# Altium PCB Twintig-IMUs.PcbDoc
Units mm, origin at the board's own origin, x right, y up, seen from the top; angles counter-clockwise.
Board outline 300 x 10 mm, 2 copper layers (Top Copper, Bottom Copper), stack 0.32 mm thick; 25 components, 23 nets, 138 pads, 42 vias.
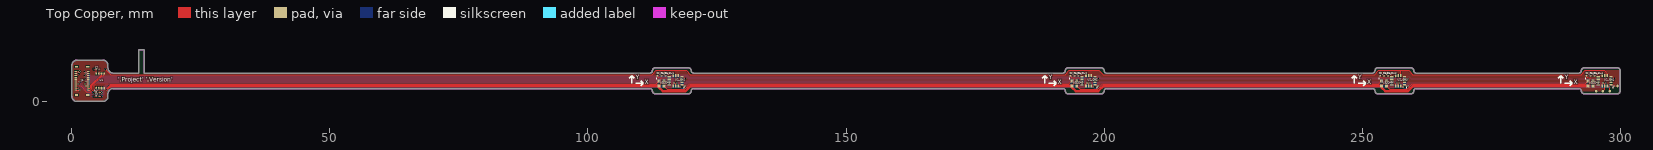
[diagram p0: Top Copper view]
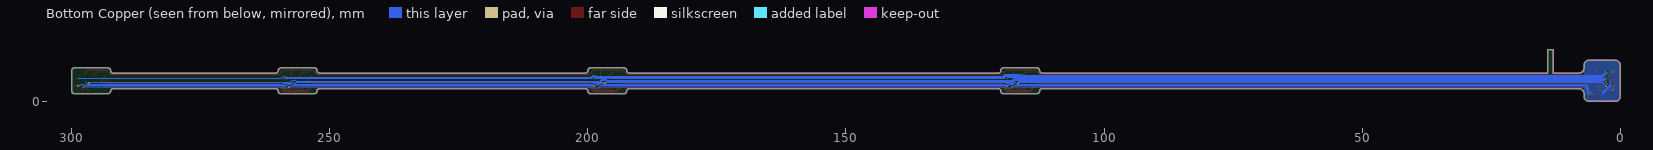
[diagram p1: Bottom Copper view, seen from below]
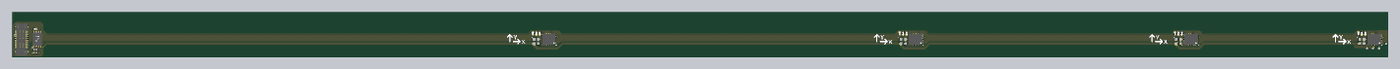
[diagram p2: 3D render of the assembled board from above, using the file's embedded part models]

## Layer stack, top to bottom
Top Coverlay: solder mask 0.0125, FC-001, Dk 4
Top Adhesive: prepreg 0.015, PP-006, Dk 4.1
Top Copper: signal copper 0.035
Polyimide: core 0.025, Core-009, Dk 4.5
Bottom Copper: signal copper 0.035
Bottom Adhesive: prepreg 0.015, PP-006, Dk 4.1
Bottom Coverlay: solder mask 0.0125, FC-001, Dk 4
Stiffener: core 0.195, Core-009, Dk 4.5

## Board outline
292,2.5 cw(c292,2) 292.5,2 ccw(c293,2) 293,1.5 299.5,1.5 ccw(c299.5,2) 300,2 300,6 ccw(c299.5,6) 299.5,6.5 293,6.5 ccw(c293,6) 292.5,6.002 292.5,6 cw(c292,6) 292,5.5 260.5,5.5 cw(c260.5,6) 260,6 ccw(c259.5,6) 259.5,6.5 253,6.5 ccw(c253,6) 252.5,6.002 252.5,6 cw(c252,6) 252,5.5 200.5,5.5 cw(c200.5,6) 200,6 200,6.002 ccw(c199.5,6) 199.5,6.5 193,6.5 ccw(c193,6) 192.5,6.002 192.5,6 cw(c192,6) 192,5.5 120.5,5.5 cw(c120.5,6) 120,6 120,6.002 ccw(c119.5,6) 119.5,6.5 113,6.5 ccw(c113,6) 112.5,6.002 112.5,6 cw(c112,6) 112,5.5 14,5.5 14,10 13,10 13,5.5 8,5.5 cw(c8,6.5) 7,6.497 7,6.5 7,7 ccw(c6,7) 6,8 1.002,8 ccw(c1.002,6.998) 0,6.998 0,1.002 ccw(c1.002,1.002) 1.002,0 6,0 ccw(c6,1) 7,1 7,1.5 cw(c8,1.5) 8,2.5 112,2.5 cw(c112,2) 112.5,2 ccw(c113,2) 113,1.5 119.5,1.5 ccw(c119.5,2) 120,1.998 120,2 cw(c120.5,2) 120.5,2.5 192,2.5 cw(c192,2) 192.5,2 ccw(c193,2) 193,1.5 199.5,1.5 ccw(c199.5,2) 200,1.998 200,2 cw(c200.5,2) 200.5,2.5 252,2.5 cw(c252,2) 252.5,2 ccw(c253,2) 253,1.5 259.5,1.5 ccw(c259.5,2) 260,1.998 260,2 cw(c260.5,2) 260.5,2.5
board region "Layer Stack Region 1": 7,1.5 7,6.497 7,6.5 7,7 7,7.098 6.962,7.292 6.886,7.474 6.777,7.637 6.637,7.777 6.474,7.886 6.292,7.962 6.098,8 6,8 1.002,8 0.904,8 0.71,7.961 0.528,7.886 0.363,7.776 0.224,7.637 0.114,7.472 0.039,7.29 0,7.096 0,6.998 0,1.002 0,0.904 0.039,0.71 0.114,0.528 0.224,0.363 0.363,0.224 0.528,0.114 0.71,0.039 0.904,0 1.002,0 6,0 6.098,0 6.292,0.038 6.474,0.114 6.637,0.223 6.777,0.363 6.886,0.526 6.962,0.708 7,0.902 7,1
board region "Layer Stack Region 6": 299.5,1.5 299.599,1.5 299.783,1.576 299.924,1.717 300,1.901 300,2 300,6 300,6.099 299.924,6.283 299.783,6.424 299.599,6.5 299.5,6.5 293,6.5 292.901,6.5 292.717,6.424 292.577,6.284 292.5,6.101 292.5,6.002 292.5,2 292.5,1.901 292.576,1.717 292.717,1.576 292.901,1.5 293,1.5
board region "Layer Stack Region 8": 259.5,1.5 259.599,1.5 259.783,1.576 259.923,1.716 260,1.899 260,1.998 260,6 260,6.099 259.924,6.283 259.783,6.424 259.599,6.5 259.5,6.5 253,6.5 252.901,6.5 252.717,6.424 252.577,6.284 252.5,6.101 252.5,6.002 252.5,2 252.5,1.901 252.576,1.717 252.717,1.576 252.901,1.5 253,1.5
board region "Layer Stack Region 5": 193,1.5 199.5,1.5 199.599,1.5 199.782,1.576 199.923,1.716 200,1.899 200,1.998 200,6.002 200,6.101 199.923,6.284 199.783,6.424 199.599,6.5 199.5,6.5 193,6.5 192.901,6.5 192.717,6.424 192.577,6.284 192.5,6.101 192.5,6.002 192.5,2 192.5,1.901 192.576,1.717 192.717,1.576 192.901,1.5
board region "Layer Stack Region 3": 113,1.5 119.5,1.5 119.599,1.5 119.782,1.576 119.923,1.716 120,1.899 120,1.998 120,6.002 120,6.101 119.923,6.284 119.783,6.424 119.599,6.5 119.5,6.5 113,6.5 112.901,6.5 112.717,6.424 112.577,6.284 112.5,6.101 112.5,6.002 112.5,2 112.5,1.901 112.576,1.717 112.717,1.576 112.901,1.5
board region "Layer Stack Region 2": 8,2.5 112,2.5 112.098,2.49 112.278,2.416 112.416,2.278 112.49,2.098 112.5,2 112.5,6.002 112.5,6 112.49,5.902 112.416,5.722 112.278,5.584 112.098,5.51 112,5.5 14,5.5 14,10 13,10 13,5.5 8,5.5 7.902,5.505 7.71,5.543 7.529,5.618 7.367,5.726 7.228,5.864 7.119,6.027 7.044,6.207 7.005,6.399 7,6.497 7,1.5 7.005,1.598 7.043,1.79 7.118,1.971 7.227,2.134 7.366,2.273 7.529,2.382 7.71,2.457 7.902,2.495
board region "Layer Stack Region 4": 120.5,2.5 192,2.5 192.098,2.49 192.278,2.416 192.416,2.278 192.49,2.098 192.5,2 192.5,6.002 192.5,6 192.49,5.902 192.416,5.722 192.278,5.584 192.098,5.51 192,5.5 120.5,5.5 120.402,5.51 120.222,5.584 120.084,5.722 120.01,5.902 120,6 120,6.002 120,1.998 120,2 120.01,2.098 120.084,2.278 120.222,2.416 120.402,2.49
board region "Default Layer Stack Region": 200.5,2.5 252,2.5 252.098,2.49 252.278,2.416 252.416,2.278 252.49,2.098 252.5,2 252.5,6.002 252.5,6 252.49,5.902 252.416,5.722 252.278,5.584 252.098,5.51 252,5.5 200.5,5.5 200.402,5.51 200.222,5.584 200.084,5.722 200.01,5.902 200,6 200,6.002 200,1.998 200,2 200.01,2.098 200.084,2.278 200.222,2.416 200.402,2.49
board region "Layer Stack Region 7": 292,2.5 292.098,2.49 292.278,2.416 292.416,2.278 292.49,2.098 292.5,2 292.5,6.002 292.5,6 292.49,5.902 292.416,5.722 292.278,5.584 292.098,5.51 292,5.5 260.5,5.5 260.402,5.51 260.222,5.584 260.084,5.722 260.01,5.902 260,6 260,1.998 260,2 260.01,2.098 260.084,2.278 260.222,2.416 260.402,2.49 260.5,2.5

## Design rules (kind name [scope] priority, off if disabled: settings)
Clearance [All] p1: gap=0.1 ignorepadtopadclearanceinfootprint=FALSE except(0: Arc-Hole Track-Hole SMDPad-Hole THPad-Hole Via-Hole Fill-Hole Poly-Hole Region-Hole Text-Hole)
DiffPairsRouting [All] p1: maxlimit=0.254 minlimit=0.1 mostfreqgap=0.1 toplayer_minwidth=0.1 toplayer_maxwidth=0.381 toplayer_prefwidth=0.1 bottomlayer_minwidth=0.1 bottomlayer_maxwidth=0.381 bottomlayer_prefwidth=0.1 substack1={55FC9977-D693-41D2-B5DD-361256E4C1CE} toplayer_{55fc9977-d693-41d2-b5dd-361256e4c1ce}_minwidth=0.381 toplayer_{55fc9977-d693-41d2-b5dd-361256e4c1ce}_maxwidth=0.381 toplayer_{55fc9977-d693-41d2-b5dd-361256e4c1ce}_prefwidth=0.381 bottomlayer_{55fc9977-d693-41d2-b5dd-361256e4c1ce}_minwidth=0.381 bottomlayer_{55fc9977-d693-41d2-b5dd-361256e4c1ce}_maxwidth=0.381 bottomlayer_{55fc9977-d693-41d2-b5dd-361256e4c1ce}_prefwidth=0.381 maxuncoupledlength=12.7
HoleSize [All] p1: absolutevalues=TRUE maxlimit=10 minlimit=0.025 maxpercent=80.000 minpercent=20.000
MinimumSolderMaskSliver [All] p1: minsoldermaskwidth=0
PlaneClearance [All] p1: clearance=0.2
PlaneConnect [All] p1: planeconnectstyle=Direct reliefexpansion=0.508 reliefentries=4 reliefconductorwidth=0.254 reliefairgap=0.254
PolygonConnect [All] p1: thpad.connectstyle=Relief thpad.reliefconductorwidth=0.254 thpad.reliefentries=4 thpad.polygonreliefangle="90 Angle" thpad.airgapwidth=0.1 smdpad.connectstyle=Relief smdpad.reliefconductorwidth=0.254 smdpad.reliefentries=4 smdpad.polygonreliefangle="90 Angle" smdpad.airgapwidth=0.1 via.connectstyle=Direct via.reliefconductorwidth=0.254 via.reliefentries=4 via.polygonreliefangle="90 Angle" via.airgapwidth=0.254
RoutingVias [All] p1: holewidth=0.711 width=1.27 viastyle="Through Hole" minholewidth=0.15 minwidth=0.35 maxholewidth=0.711 maxwidth=1.27
SilkToSolderMaskClearance [IsPad] p1: minsilkscreentomaskgap=0.1 clearancetoexposedcopper=TRUE
SolderMaskExpansion [All] p1: expansion=0.102 istentingtop=FALSE
SupplyNets "Schematic Supply Nets_2" [InNet('3.3V')] p1: voltage=0.000
SupplyNets "Schematic Supply Nets_1" [InNet('GND')] p2: voltage=0.000
SupplyNets "Schematic Supply Nets" [InNet('5V')] p3: voltage=0.000
Width [All] p1: maxlimit=1 minlimit=0.05 preferedwidth=0.1 substack1={55FC9977-D693-41D2-B5DD-361256E4C1CE}
24 further rules are at their usual default settings.

## Classes and differential pairs
channel class IMU: CH1 CH2 CH3 CH4
component class CH4: C2_CH4 C3_CH4 C4_CH4 U2_CH4 U3_CH4
component class CH3: C2_CH3 C3_CH3 C4_CH3 U2_CH3 U3_CH3
component class CH2: C2_CH2 C3_CH2 C4_CH2 U2_CH2 U3_CH2
component class CH1: C2_CH1 C3_CH1 C4_CH1 U2_CH1 U3_CH1
component class EEPROM: C1 U1
component class Connector: J1 R1 R2

## Components (designator, comment, footprint, x,y, rotation, side; value= is the part's Value field where it differs from the comment)
C1 "100nF" "CAPACITOR 0201" 5,6.25 r180 top
C2_CH1 "1uF" "CAPACITOR 0201" 113.5,5.25 r270 top (schematic designator C2)
C2_CH2 "1uF" "CAPACITOR 0201" 193.5,5.25 r270 top (schematic designator C2)
C2_CH3 "1uF" "CAPACITOR 0201" 253.5,5.25 r270 top (schematic designator C2)
C2_CH4 "1uF" "CAPACITOR 0201" 293.5,5.25 r270 top (schematic designator C2)
C3_CH1 "100nF" "CAPACITOR 0201" 114.25,5.275 r90 top (schematic designator C3)
C3_CH2 "100nF" "CAPACITOR 0201" 194.25,5.275 r90 top (schematic designator C3)
C3_CH3 "100nF" "CAPACITOR 0201" 254.25,5.275 r90 top (schematic designator C3)
C3_CH4 "100nF" "CAPACITOR 0201" 294.25,5.275 r90 top (schematic designator C3)
C4_CH1 "2.2uF" "CAPACITOR 0201" 115,5.275 r90 top (schematic designator C4)
C4_CH2 "2.2uF" "CAPACITOR 0201" 195,5.275 r90 top (schematic designator C4)
C4_CH3 "2.2uF" "CAPACITOR 0201" 255,5.275 r90 top (schematic designator C4)
C4_CH4 "2.2uF" "CAPACITOR 0201" 295,5.275 r90 top (schematic designator C4)
J1 "Molex 502426-2030" "MOLEX 502426-2030" 2,4 r270 top
R1 "33R" "Resistor 0201" 5,1.75 r0 top
R2 "33R" "Resistor 0201" 5,1 r0 top
U1 "24AA32AT-I/MC" "TDFN-8 2X3MM" 5.5,4 r90 top
U2_CH1 "ICM-45686" ICM-45686 117,4 r180 top (schematic designator U2)
U2_CH2 "ICM-45686" ICM-45686 197,4 r180 top (schematic designator U2)
U2_CH3 "ICM-45686" ICM-45686 257,4 r180 top (schematic designator U2)
U2_CH4 "ICM-45686" ICM-45686 297,4 r180 top (schematic designator U2)
U3_CH1 "SK6805-EC15" SK6805-EC15 114.25,3.5 r270 top (schematic designator U3)
U3_CH2 "SK6805-EC15" SK6805-EC15 194.25,3.5 r270 top (schematic designator U3)
U3_CH3 "SK6805-EC15" SK6805-EC15 254.25,3.5 r270 top (schematic designator U3)
U3_CH4 "SK6805-EC15" SK6805-EC15 294.25,3.5 r270 top (schematic designator U3)

## Footprints (in the part's own frame and the unit in brackets; to place one, negate y for a bottom-side part, rotate by r counter-clockwise, add the part's x,y. Pads: shape width x height; smd on the part's side, far side on the other; paste and mask are expansions set on the pad)
"CAPACITOR 0201" [mm]
  rect 0.25x0.35 smd: 1(-0.275,0) 2(0.275,0)
  body extent -0.3,-0.15 0.3,0.15, height 0.3
ICM-45686 [mm]
  rect 0.6x0.3 smd mask+0.102: 1(-1.25,0.75)
  rect 0.6x0.3 smd: 2(-1.25,0.25) 3(-1.25,-0.25) 4(-1.25,-0.75) 8(1.25,-0.75) 9(1.25,-0.25) 10(1.25,0.25) 11(1.25,0.75)
  rect 0.3x0.6 smd: 5(-0.5,-1) 6(0,-1) 7(0.5,-1) 12(0.5,1) 13(0,1) 14(-0.5,1)
  silkscreen extent -1.65,1.25 -1.55,1.35, body extent -1.5,-1.25 1.5,1.25, height 0.81
"MOLEX 502426-2030" [mm]
  rect 0.22x0.475 smd: 1(-1.8,-1.212) 2(-1.4,-1.212) 3(-1,-1.212) 4(-0.6,-1.212) 5(-0.2,-1.212) 6(0.2,-1.212) 7(0.6,-1.212) 8(1,-1.212) 9(1.4,-1.212) 10(1.8,-1.212) 11(-1.8,1.212) 12(-1.4,1.212) 13(-1,1.212) 14(-0.6,1.212) 15(-0.2,1.212) 16(0.2,1.212) 17(0.6,1.212) 18(1,1.212) 19(1.4,1.212) 20(1.8,1.212)
  rect 0.32x0.65 smd: Nail(-2.75,1.085) Nail(-2.75,-1.085) Nail(2.75,1.085) Nail(2.75,-1.085)
  body extent -3.55,-1.3 3.55,1.3, height 0.98
"Resistor 0201" [mm]
  rect 0.25x0.35 smd: 1(-0.275,0) 2(0.275,0)
  body extent -0.3,-0.15 0.3,0.15, height 0.23
SK6805-EC15 [mm]
  rect 0.55x0.55 smd: 1(-0.475,-0.475) 2(0.475,-0.475) 3(0.475,0.475) 4(-0.475,0.475)
  silkscreen extent -1,-1 -0.9,-0.9, body extent -0.75,-0.75 0.75,0.75, height 0.65
"TDFN-8 2X3MM" [mm]
  rect 0.45x0.3 smd: 1(-1.425,0.75) 2(-1.425,0.25) 3(-1.425,-0.25) 4(-1.425,-0.75) 5(1.425,-0.75) 6(1.425,-0.25) 7(1.425,0.25) 8(1.425,0.75)
  silkscreen extent -1.9,1.05 -1.8,1.15, body extent -1.5,-1 1.5,1, height 0.73

## Part data
C1 C2_CH1 C2_CH2 C2_CH3 C2_CH4 C3_CH1 C3_CH2 C3_CH3 C3_CH4 C4_CH1 C4_CH2 C4_CH3 C4_CH4: library part Capacitor
R1 R2: library part Resistor
U1: library part 24AA32A

## Free pads (board coordinates)
  round 0.5 smd: TP(295.35,2) TP(296.65,2) TP(298,2) TP(299.5,3)

## Via types
v1: diameter 0.35, hole 0.15, Top Copper to Bottom Copper, tented both sides, 42 vias

## Nets (pads, with @x,y where several pads share a name; then routed paths per layer and width w, separated by ;. In a path a pad name is that pad's centre, name@x,y a point inside that pad or via, vN(x,y) a via of type N, cw(c..) or ccw(c..) an arc to the next point about the centre after c; other vN are vias at no path point)
3.3V: C1.2 C3_CH1.2 C3_CH2.2 C3_CH3.2 C3_CH4.2 C4_CH1.2 C4_CH2.2 C4_CH3.2 C4_CH4.2 J1.1 J1.2 U1.8 U2_CH1.5 U2_CH1.8 U2_CH2.5 U2_CH2.8 U2_CH3.5 U2_CH3.8 U2_CH4.5 U2_CH4.8 | length 309.8
  Top Copper w0.1: v1(4.25,6.25) C1.2 4.75,6.225 U1.8 ; v1(6.5,6.25) 7.55,5.2 111.5,5.2 112.45,5.2 113.25,6 114.25,6 ; C3_CH1.2 114.25,6 ; U2_CH1.8 115.75,5.15 115.35,5.55 C4_CH1.2 115,6 ; U2_CH1.5 117.5,6 ; C3_CH2.2 194.25,6 ; U2_CH2.8 195.75,5.15 195.35,5.55 C4_CH2.2 195,6 ; 197.5,5.8 U2_CH2.5 197.5,6 ; U2_CH3.8 255.75,5.15 255.35,5.55 C4_CH3.2 255,5.8 255,6 ; U2_CH3.5 257.5,6 ; C3_CH4.2 294.25,6 ; U2_CH4.8 295.75,5.15 295.35,5.55 C4_CH4.2 295,6 ; U2_CH4.5 297.5,5.4 296.9,6 295,6 ; 114.25,6 115,6 ; 115,6 117.5,6 ; 117.5,6 119,6 119.8,5.2 192.45,5.2 193.25,6 194.25,6 ; 194.25,6 195,6 ; 195,6 199,6 199.8,5.2 252.45,5.2 253.25,6 254.25,6 ; 254.25,5.8 C3_CH3.2 254.25,5.8 ; 254.25,5.8 254.25,6 ; 254.25,6 255,6 ; 255,6 259,6 259.8,5.2 261,5.2 292.45,5.2 293.25,6 294.25,6 ; 294.25,6 295,6
  Top Copper w0.2: J1.2 v1(1.25,5.4) ; J1.1 v1(1.5,5.8)
5V: C2_CH1.2 C2_CH2.2 C2_CH3.2 C2_CH4.2 J1.9 J1.10 U3_CH1.2 U3_CH2.2 U3_CH3.2 U3_CH4.2 | length 302.3
  Top Copper w0.1: C2_CH1.2 113.5,4.8 113.75,4.55 114.1,4.55 114.25,4.4 114.25,3.5 U3_CH1.2@113.75,3 ; C2_CH2.2 193.5,4.8 193.75,4.55 194.1,4.55 194.25,4.4 194.25,3.5 U3_CH2.2@193.75,3 ; C2_CH3.2 253.5,4.8 253.75,4.55 254.1,4.55 254.25,4.4 254.25,3.5 U3_CH3.2@253.75,3 ; C2_CH4.2 293.5,4.8 293.75,4.55 294.1,4.55 294.25,4.4 294.25,3.5 U3_CH4.2@293.75,3
  Top Copper w0.2: J1.10 v1(1.5,2.2) ; J1.9 v1(1.25,2.6)
  Top Copper w0.5: v1(6.755,2.271) 7.485,3 9,3 112,3 U3_CH1.2@113.75,3 ; U3_CH1.2 113.775,2.725 114.525,1.975 118.875,1.975 119.9,3 121,3 192,3 U3_CH2.2@193.75,3 ; U3_CH2.2 193.775,2.725 194.525,1.975 198.875,1.975 199.9,3 201,3 252,3 U3_CH3.2@253.75,3 ; U3_CH3.2 253.775,2.725 254.525,1.975 258.875,1.975 259.9,3 261,3 292,3 U3_CH4.2@293.75,3
CS1: J1.18 U2_CH1.12 | length 115.3
  Top Copper w0.1: v1(2.75,3) J1.18 ; U2_CH1.12 116.5,3.4 v1(116.7,3.6)
  Bottom Copper w0.1: v1(2.75,3) 2.755,3.005 3.005,3.005 3.6,3.6 7,3.6 112,3.6 v1(116.7,3.6)
CS2: J1.17 U2_CH2.12 | length 196
  Top Copper w0.1: v1(2.5,3.4) J1.17 ; U2_CH2.12 196.5,3.4 v1(196.7,3.6)
  Bottom Copper w0.1: v1(2.5,3.4) 3.1,3.4 3.5,3.8 7,3.8 112,3.8 116.4,3.8 116.6,4 117.3,4 117.7,3.6 v1(196.7,3.6)
CS3: J1.16 U2_CH3.12 | length 255.7
  Top Copper w0.1: v1(2.75,3.8) J1.16 ; U2_CH3.12 256.5,3.4 v1(256.7,3.6)
  Bottom Copper w0.1: v1(2.75,3.8) 2.95,4 9,4 112,4 116.3,4 116.5,4.2 117.4,4.2 117.8,3.8 196.4,3.8 196.6,4 197.3,4 197.7,3.6 v1(256.7,3.6)
CS4: J1.15 U2_CH4.12 | length 296.3
  Top Copper w0.1: v1(2.5,4.2) J1.15 ; U2_CH4.12 296.5,3.4 v1(296.7,3.6)
  Bottom Copper w0.1: v1(2.5,4.2) 116.2,4.2 116.4,4.4 117.5,4.4 117.9,4 192,4 196.3,4 196.5,4.2 197.4,4.2 197.8,3.8 256.3,3.8 256.5,4 257.4,4 257.8,3.6 v1(296.7,3.6)
DOUT_CH1: U3_CH1.3 U3_CH2.1 | length 80
  Top Copper w0.1: U3_CH1.3 115.35,2.4 118.733,2.4 119.733,3.4 121,3.4 192,3.4 193.2,3.4 U3_CH2.1
DOUT_CH2: U3_CH2.3 U3_CH3.1 | length 60
  Top Copper w0.1: U3_CH2.3 195.35,2.4 198.733,2.4 199.733,3.4 201,3.4 252,3.4 253.2,3.4 U3_CH3.1
DOUT_CH3: U3_CH3.3 U3_CH4.1 | length 40
  Top Copper w0.1: U3_CH3.3 255.35,2.4 258.733,2.4 259.733,3.4 261,3.4 292,3.4 293.2,3.4 U3_CH4.1
DOUT_CH4: U3_CH4.3
GND: C1.1 C2_CH1.1 C2_CH2.1 C2_CH3.1 C2_CH4.1 C3_CH1.1 C3_CH2.1 C3_CH3.1 C3_CH4.1 C4_CH1.1 C4_CH2.1 C4_CH3.1 C4_CH4.1 J1.3 J1.4 pad.TP@295.35,2 U1.1 U1.2 U1.3 U1.4 U1.7 U2_CH1.6 U2_CH1.7 U2_CH2.6 U2_CH2.7 U2_CH3.6 U2_CH3.7 U2_CH4.6 U2_CH4.7 U3_CH1.4 U3_CH2.4 U3_CH3.4 U3_CH4.4
INT1: J1.14 U2_CH1.4 | length 117.7
  Top Copper w0.1: v1(2.75,4.6) J1.14 ; U2_CH1.4 118.55,4.75 v1(118.9,4.4)
  Bottom Copper w0.1: v1(2.75,4.6) 2.95,4.4 116.1,4.4 116.3,4.6 118.7,4.6 v1(118.9,4.4)
INT2: J1.13 U2_CH2.4 | length 198.3
  Top Copper w0.1: v1(2.5,5) J1.13 ; U2_CH2.4 198.55,4.75 v1(198.9,4.4)
  Bottom Copper w0.1: v1(2.5,5) 3.1,5 3.5,4.6 9,4.6 112,4.6 116,4.6 116.2,4.8 119,4.8 119.4,4.4 v1(198.9,4.4)
INT3: J1.12 U2_CH3.4 | length 258.2
  Top Copper w0.1: v1(2.75,5.4) J1.12 ; U2_CH3.4 258.55,4.75 v1(258.9,4.4)
  Bottom Copper w0.1: v1(2.75,5.4) 2.755,5.395 3.005,5.395 3.6,4.8 9,4.8 112,4.8 115.9,4.8 116.1,5 119.1,5 119.5,4.6 198.5,4.6 198.7,4.8 199,4.8 199.4,4.4 v1(258.9,4.4)
INT4: J1.11 U2_CH4.4 | length 299
  Top Copper w0.1: v1(2.5,5.8) J1.11 ; U2_CH4.4 298.55,4.75 v1(298.9,4.4)
  Bottom Copper w0.1: v1(2.5,5.8) 2.9,5.8 3.7,5 7,5 112,5 115.8,5 116,5.2 119.2,5.2 119.6,4.8 198.4,4.8 198.6,5 199.1,5 199.5,4.6 258.5,4.6 258.7,4.8 259.1,4.8 259.5,4.4 v1(298.9,4.4)
RGB: J1.8 U3_CH1.1 | length 114.7
  Top Copper w0.1: J1.8 1.7,3 2.8,1.9 3.7,1.9 4.1,2.3 4.1,2.9 4.6,3.4 7,3.4 112,3.4 113.2,3.4 U3_CH1.1
SCK: pad.TP@296.65,2 R1.2 U2_CH1.13 U2_CH2.13 U2_CH3.13 U2_CH4.13 | length 297.9
  Top Copper w0.1: R1.2 v1(5.75,1.75) ; U2_CH1.13 117,3.4 v1(117.2,3.6) ; U2_CH2.13 197,3.4 v1(197.2,3.6) ; U2_CH3.13 257,3.4 v1(257.2,3.6) ; pad.TP@296.65,2 297,2.35 U2_CH4.13 297,3.4 v1(297.2,3.6)
  Bottom Copper w0.1: v1(5.75,1.75) 5.75,2.35 6.6,3.2 116.8,3.2 v1(117.2,3.6) 117.221,3.579 117.438,3.579 117.617,3.4 119,3.4 119.2,3.2 196.8,3.2 v1(197.2,3.6) 197.221,3.579 197.438,3.579 197.617,3.4 199,3.4 199.2,3.2 256.8,3.2 v1(257.2,3.6) 257.221,3.579 257.438,3.579 257.617,3.4 259,3.4 259.2,3.2 296.8,3.2 v1(297.2,3.6)
"SCK R": J1.5 R1.1 | length 5.4
  Top Copper w0.1: J1.5 v1(1.75,4.2) ; v1(4.25,1.75) R1.1
  Bottom Copper w0.1: v1(1.75,4.2) 2,3.95 2,3.2 3.45,1.75 v1(4.25,1.75)
SCL: J1.19 U1.6 | length 4.2
  Top Copper w0.1: J1.19 3.6,2.6 3.7,2.7 3.7,3.1 5.75,5.15 U1.6 U1.6@5.709,5.384
SDA: J1.20 U1.5 | length 4.8
  Top Copper w0.1: J1.20 3.6,2.2 3.9,2.5 3.9,3 5.9,5 6.1,5 6.25,5.15 U1.5
SDI: J1.6 pad.TP@299.5,3 U2_CH1.1 U2_CH2.1 U2_CH3.1 U2_CH4.1 | length 304.4
  Top Copper w0.1: J1.6 v1(1.5,3.8) ; U2_CH1.1 118.55,3.25 v1(118.8,3) ; U2_CH2.1 198.55,3.25 v1(198.8,3) ; U2_CH3.1 258.55,3.25 v1(258.8,3) ; U2_CH4.1 298.55,3.25 v1(298.8,3) pad.TP@299.5,3
  Bottom Copper w0.1: v1(1.5,3.8) 1.7,3.6 1.7,3.2 3.525,1.375 5.875,1.375 6.1,1.6 6.1,2.4 6.7,3 117.4,3 117.6,3.2 118.2,3.2 118.4,3 v1(118.8,3) 197.4,3 197.6,3.2 198.2,3.2 198.4,3 v1(198.8,3) 257.4,3 257.6,3.2 258.2,3.2 258.4,3 v1(258.8,3) 297.4,3 297.6,3.2 298.2,3.2 298.4,3 v1(298.8,3)
SDO: pad.TP@298,2 R2.2 U2_CH1.14 U2_CH2.14 U2_CH3.14 U2_CH4.14 | length 296.9
  Top Copper w0.1: R2.2 v1(5.75,1) ; U2_CH1.14 117.7,3 v1(117.9,2.8) ; U2_CH2.14 197.7,3 v1(197.9,2.8) ; U2_CH3.14 257.7,3 v1(257.9,2.8) ; U2_CH4.14 297.7,3 v1(297.9,2.8) 298,2.7 pad.TP@298,2
  Bottom Copper w0.1: 5.9,1.1 6.3,1.5 6.3,2.3 6.8,2.8 v1(117.9,2.8) 118.1,2.6 119,2.6 119.2,2.8 v1(197.9,2.8) 198.1,2.6 199,2.6 199.2,2.8 v1(257.9,2.8) 258.1,2.6 259,2.6 259.2,2.8 v1(297.9,2.8)
"SDO R": J1.7 R2.1 | length 5
  Top Copper w0.1: J1.7 v1(1.25,3.4) ; v1(4.25,1) R2.1
  Bottom Copper w0.1: v1(1.25,3.4) 1.25,3.367 3.617,1 v1(4.25,1)
pads on no net: J1.Nail U2_CH1.2 U2_CH1.3 U2_CH1.9 U2_CH1.10 U2_CH1.11 U2_CH2.2 U2_CH2.3 U2_CH2.9 U2_CH2.10 U2_CH2.11 U2_CH3.2 U2_CH3.3 U2_CH3.9 U2_CH3.10 U2_CH3.11 U2_CH4.2 U2_CH4.3 U2_CH4.9 U2_CH4.10 U2_CH4.11

## Polygon pours and split planes (outlines as drawn)
no net on Mechanical 1 "NONET_L-01_P-001" (solid): 192.5,6 cw(c192.999,6.001) 193,6.5 199.5,6.5 cw(c199.5,6) 200,6 200,2 cw(c199.5,2) 199.5,1.5 193,1.5 cw(c193,2) 192.5,2
no net on Mechanical 1 "NONET_L-01_P-001" (solid): 252.5,6 cw(c252.999,6.001) 253,6.5 259.5,6.5 cw(c259.5,6) 260,6 260,2 cw(c259.5,2) 259.5,1.5 253,1.5 cw(c253,2) 252.5,2
no net on Mechanical 1 "NONET_L-01_P-001" (solid): 292.5,6 cw(c292.999,6.001) 293,6.5 299.5,6.5 cw(c299.5,6) 300,6 300,2 cw(c299.5,2) 299.5,1.5 293,1.5 cw(c293,2) 292.5,2
no net on Mechanical 1 "NONET_L-01_P-001" (solid): 112.5,6 cw(c112.999,6.001) 113,6.5 119.5,6.5 cw(c119.5,6) 120,6 120,2 cw(c119.5,2) 119.5,1.5 113,1.5 cw(c113,2) 112.5,2
no net on Mechanical 1 "NONET_L-01_P-001" (solid): 0,7 cw(c1,7) 1,8 6,8 cw(c6,7) 7,7 7,1 cw(c6,1) 6,0 1,0 cw(c1,1) 0,1
GND on Top Copper "NONET_L-01_P-001" (solid, remove dead copper, pour order 2): 0,0 0,8 7,8 7,6 300,6 300,2 7,2 7,0
5V on Bottom Copper "NONET_L-01_P-001" (solid, pour order 4): 0,4 7,4 7,0 0,0
3.3V on Bottom Copper "NONET_L-01_P-001" (solid, pour order 3): 0,8 7,8 7,4 0,4
no net on Layer0 "Default Coverlay 1 Top" (split plane): 293,6.5 292.901,6.5 292.717,6.424 292.577,6.284 292.5,6.101 292.5,6.002 292.5,2 292.5,1.901 292.576,1.717 292.717,1.576 292.901,1.5 293,1.5 299.5,1.5 299.599,1.5 299.783,1.576 299.924,1.717 300,1.901 300,2 300,6 300,6.099 299.924,6.283 299.783,6.424 299.599,6.5 299.5,6.5
no net on Layer0 "Default Coverlay 1 Top" (split plane): 253,6.5 252.901,6.5 252.717,6.424 252.577,6.284 252.5,6.101 252.5,6.002 252.5,2 252.5,1.901 252.576,1.717 252.717,1.576 252.901,1.5 253,1.5 259.5,1.5 259.599,1.5 259.783,1.576 259.923,1.716 260,1.899 260,1.998 260,6 260,6.099 259.924,6.283 259.783,6.424 259.599,6.5 259.5,6.5
no net on Layer0 "Default Coverlay 1 Top" (split plane): 199.5,1.5 199.599,1.5 199.782,1.576 199.923,1.716 200,1.899 200,1.998 200,6.002 200,6.101 199.923,6.284 199.783,6.424 199.599,6.5 199.5,6.5 193,6.5 192.901,6.5 192.717,6.424 192.577,6.284 192.5,6.101 192.5,6.002 192.5,2 192.5,1.901 192.576,1.717 192.717,1.576 192.901,1.5 193,1.5
no net on Layer0 "Default Coverlay 1 Top" (split plane): 119.5,1.5 119.599,1.5 119.782,1.576 119.923,1.716 120,1.899 120,1.998 120,6.002 120,6.101 119.923,6.284 119.783,6.424 119.599,6.5 119.5,6.5 113,6.5 112.901,6.5 112.717,6.424 112.577,6.284 112.5,6.101 112.5,6.002 112.5,2 112.5,1.901 112.576,1.717 112.717,1.576 112.901,1.5 113,1.5
no net on Layer0 "Default Coverlay 1 Top" (split plane): 7,6.497 7,6.5 7,7 7,7.098 6.962,7.292 6.886,7.474 6.777,7.637 6.637,7.777 6.474,7.886 6.292,7.962 6.098,8 6,8 1.002,8 0.904,8 0.71,7.961 0.528,7.886 0.363,7.776 0.224,7.637 0.114,7.472 0.039,7.29 0,7.096 0,0.904 0.039,0.71 0.114,0.528 0.224,0.363 0.363,0.224 0.528,0.114 0.71,0.039 0.904,0 1.002,0 6,0 6.098,0 6.292,0.038 6.474,0.114 6.637,0.223 6.777,0.363 6.886,0.526 6.962,0.708 7,0.902 7,1
no net on Layer0 "Default Coverlay 1 Bottom" (split plane): 293,6.5 292.901,6.5 292.717,6.424 292.577,6.284 292.5,6.101 292.5,6.002 292.5,2 292.5,1.901 292.576,1.717 292.717,1.576 292.901,1.5 293,1.5 299.5,1.5 299.599,1.5 299.783,1.576 299.924,1.717 300,1.901 300,2 300,6 300,6.099 299.924,6.283 299.783,6.424 299.599,6.5 299.5,6.5
no net on Layer0 "Default Coverlay 1 Bottom" (split plane): 253,6.5 252.901,6.5 252.717,6.424 252.577,6.284 252.5,6.101 252.5,6.002 252.5,2 252.5,1.901 252.576,1.717 252.717,1.576 252.901,1.5 253,1.5 259.5,1.5 259.599,1.5 259.783,1.576 259.923,1.716 260,1.899 260,1.998 260,6 260,6.099 259.924,6.283 259.783,6.424 259.599,6.5 259.5,6.5
no net on Layer0 "Default Coverlay 1 Bottom" (split plane): 199.5,1.5 199.599,1.5 199.782,1.576 199.923,1.716 200,1.899 200,1.998 200,6.002 200,6.101 199.923,6.284 199.783,6.424 199.599,6.5 199.5,6.5 193,6.5 192.901,6.5 192.717,6.424 192.577,6.284 192.5,6.101 192.5,6.002 192.5,2 192.5,1.901 192.576,1.717 192.717,1.576 192.901,1.5 193,1.5
no net on Layer0 "Default Coverlay 1 Bottom" (split plane): 119.5,1.5 119.599,1.5 119.782,1.576 119.923,1.716 120,1.899 120,1.998 120,6.002 120,6.101 119.923,6.284 119.783,6.424 119.599,6.5 119.5,6.5 113,6.5 112.901,6.5 112.717,6.424 112.577,6.284 112.5,6.101 112.5,6.002 112.5,2 112.5,1.901 112.576,1.717 112.717,1.576 112.901,1.5 113,1.5
no net on Layer0 "Default Coverlay 1 Bottom" (split plane): 7,6.497 7,6.5 7,7 7,7.098 6.962,7.292 6.886,7.474 6.777,7.637 6.637,7.777 6.474,7.886 6.292,7.962 6.098,8 6,8 1.002,8 0.904,8 0.71,7.961 0.528,7.886 0.363,7.776 0.224,7.637 0.114,7.472 0.039,7.29 0,7.096 0,0.904 0.039,0.71 0.114,0.528 0.224,0.363 0.363,0.224 0.528,0.114 0.71,0.039 0.904,0 1.002,0 6,0 6.098,0 6.292,0.038 6.474,0.114 6.637,0.223 6.777,0.363 6.886,0.526 6.962,0.708 7,0.902 7,1
no net on Layer0 "Default Coverlay 2 Top" (split plane): 260.5,5.5 260.402,5.51 260.222,5.584 260.084,5.722 260.01,5.902 260,6 260,1.998 260,2 260.01,2.098 260.084,2.278 260.222,2.416 260.402,2.49 260.5,2.5 292,2.5 292.098,2.49 292.278,2.416 292.416,2.278 292.49,2.098 292.5,2 292.5,6.002 292.5,6 292.49,5.902 292.416,5.722 292.278,5.584 292.098,5.51 292,5.5
no net on Layer0 "Default Coverlay 2 Top" (split plane): 252,2.5 252.098,2.49 252.278,2.416 252.416,2.278 252.49,2.098 252.5,2 252.5,6.002 252.5,6 252.49,5.902 252.416,5.722 252.278,5.584 252.098,5.51 252,5.5 200.5,5.5 200.402,5.51 200.222,5.584 200.084,5.722 200.01,5.902 200,6 200,6.002 200,1.998 200,2 200.01,2.098 200.084,2.278 200.222,2.416 200.402,2.49 200.5,2.5
no net on Layer0 "Default Coverlay 2 Top" (split plane): 192,2.5 192.098,2.49 192.278,2.416 192.416,2.278 192.49,2.098 192.5,2 192.5,6.002 192.5,6 192.49,5.902 192.416,5.722 192.278,5.584 192.098,5.51 192,5.5 120.5,5.5 120.402,5.51 120.222,5.584 120.084,5.722 120.01,5.902 120,6 120,6.002 120,1.998 120,2 120.01,2.098 120.084,2.278 120.222,2.416 120.402,2.49 120.5,2.5
no net on Layer0 "Default Coverlay 2 Top" (split plane): 112,2.5 112.098,2.49 112.278,2.416 112.416,2.278 112.49,2.098 112.5,2 112.5,6.002 112.5,6 112.49,5.902 112.416,5.722 112.278,5.584 112.098,5.51 112,5.5 14,5.5 14,10 13,10 13,5.5 8,5.5 7.902,5.505 7.71,5.543 7.529,5.618 7.367,5.726 7.228,5.864 7.119,6.027 7.044,6.207 7.005,6.399 7,6.497 7,1.5 7.005,1.598 7.043,1.79 7.118,1.971 7.227,2.134 7.366,2.273 7.529,2.382 7.71,2.457 7.902,2.495 8,2.5
no net on Layer0 "Default Coverlay 2 Bottom" (split plane): 260.5,5.5 260.402,5.51 260.222,5.584 260.084,5.722 260.01,5.902 260,6 260,1.998 260,2 260.01,2.098 260.084,2.278 260.222,2.416 260.402,2.49 260.5,2.5 292,2.5 292.098,2.49 292.278,2.416 292.416,2.278 292.49,2.098 292.5,2 292.5,6.002 292.5,6 292.49,5.902 292.416,5.722 292.278,5.584 292.098,5.51 292,5.5
no net on Layer0 "Default Coverlay 2 Bottom" (split plane): 252,2.5 252.098,2.49 252.278,2.416 252.416,2.278 252.49,2.098 252.5,2 252.5,6.002 252.5,6 252.49,5.902 252.416,5.722 252.278,5.584 252.098,5.51 252,5.5 200.5,5.5 200.402,5.51 200.222,5.584 200.084,5.722 200.01,5.902 200,6 200,6.002 200,1.998 200,2 200.01,2.098 200.084,2.278 200.222,2.416 200.402,2.49 200.5,2.5
no net on Layer0 "Default Coverlay 2 Bottom" (split plane): 192,2.5 192.098,2.49 192.278,2.416 192.416,2.278 192.49,2.098 192.5,2 192.5,6.002 192.5,6 192.49,5.902 192.416,5.722 192.278,5.584 192.098,5.51 192,5.5 120.5,5.5 120.402,5.51 120.222,5.584 120.084,5.722 120.01,5.902 120,6 120,6.002 120,1.998 120,2 120.01,2.098 120.084,2.278 120.222,2.416 120.402,2.49 120.5,2.5
no net on Layer0 "Default Coverlay 2 Bottom" (split plane): 112,2.5 112.098,2.49 112.278,2.416 112.416,2.278 112.49,2.098 112.5,2 112.5,6.002 112.5,6 112.49,5.902 112.416,5.722 112.278,5.584 112.098,5.51 112,5.5 14,5.5 14,10 13,10 13,5.5 8,5.5 7.902,5.505 7.71,5.543 7.529,5.618 7.367,5.726 7.228,5.864 7.119,6.027 7.044,6.207 7.005,6.399 7,6.497 7,1.5 7.005,1.598 7.043,1.79 7.118,1.971 7.227,2.134 7.366,2.273 7.529,2.382 7.71,2.457 7.902,2.495 8,2.5

## Keep-outs
Keep-Out Layer:
  lines w0.15: 112,2.5 8,2.5 ccw(c8,1.5) 7,1.5 7,1 cw(c6,1) 6,0 1.002,0 cw(c1.002,1.002) 0,1.002 0,6.998 cw(c1.002,6.998) 1.002,8 6,8 cw(c6,7) 7,7 7,6.5 ccw(c8,6.5) 8,5.5 13,5.5 13,10 14,10 14,5.5 112,5.5 ccw(c112,6) 112.5,6 cw(c113,6) 113,6.5 119.5,6.5 cw(c119.5,6) 120,6 ccw(c120.5,6) 120.5,5.5 192,5.5 ccw(c192,6) 192.5,6 cw(c193,6) 193,6.5 199.5,6.5 cw(c199.5,6) 200,6 ccw(c200.5,6) 200.5,5.5 252,5.5 ccw(c252,6) 252.5,6 cw(c253,6) 253,6.5 259.5,6.5 cw(c259.5,6) 260,6 ccw(c260.5,6) 260.5,5.5 292,5.5 ccw(c292,6) 292.5,6 cw(c293,6) 293,6.5 299.5,6.5 cw(c299.5,6) 300,6 300,2 cw(c299.5,2) 299.5,1.5 293,1.5 cw(c293,2) 292.5,2 ccw(c292,2) 292,2.5 260.5,2.5 ccw(c260.5,2) 260,2 cw(c259.5,2) 259.5,1.5 253,1.5 cw(c253,2) 252.5,2 ccw(c252,2) 252,2.5 200.5,2.5 ; 112,2.5 cw(c112,2) 112.5,2 ccw(c113,2) 113,1.5 119.5,1.5 ccw(c119.5,2) 120,2 cw(c120.5,2) 120.5,2.5 192,2.5 cw(c192,2) 192.5,2 ccw(c193,2) 193,1.5 199.5,1.5 ccw(c199.5,2) 200,2 cw(c200.5,2) 200.5,2.5

## Silkscreen, mask and mechanical layers (free items; w line width, h text height)
Top Overlay:
  lines w0.25: 108,4.5 108.5,5 ; 108.5,3.5 108.5,5 ; 109,4.5 108.5,5 ; 109.25,3.5 110.75,3.5 ; 110.25,3 110.75,3.5 ; 110.25,4 110.75,3.5 ; 188,4.5 188.5,5 ; 188.5,3.5 188.5,5 ; 189,4.5 188.5,5 ; 189.25,3.5 190.75,3.5 ; 190.25,3 190.75,3.5 ; 190.25,4 190.75,3.5 ; 248,4.5 248.5,5 ; 248.5,3.5 248.5,5 ; 249,4.5 248.5,5 ; 249.25,3.5 250.75,3.5 ; 250.25,3 250.75,3.5 ; 250.25,4 250.75,3.5 ; 288,4.5 288.5,5 ; 288.5,3.5 288.5,5 ; 289,4.5 288.5,5 ; 289.25,3.5 290.75,3.5 ; 290.25,3 290.75,3.5 ; 290.25,4 290.75,3.5
  text "Y" at 109.249,4 h1.5
  text "Y" at 189.249,4 h1.5
  text "Y" at 249.249,4 h1.5
  text "Y" at 289.249,4 h1.5
  text "'.Project' '.Version'" at 9,3.532 h1.5
  text "X" at 111,3 h1.5
  text "X" at 191,3 h1.5
  text "X" at 251,3 h1.5
  text "X" at 291,3 h1.5